# EAGLE board Qwiic_Button-Panel (EAGLE 9.4.0), part 1 of 2
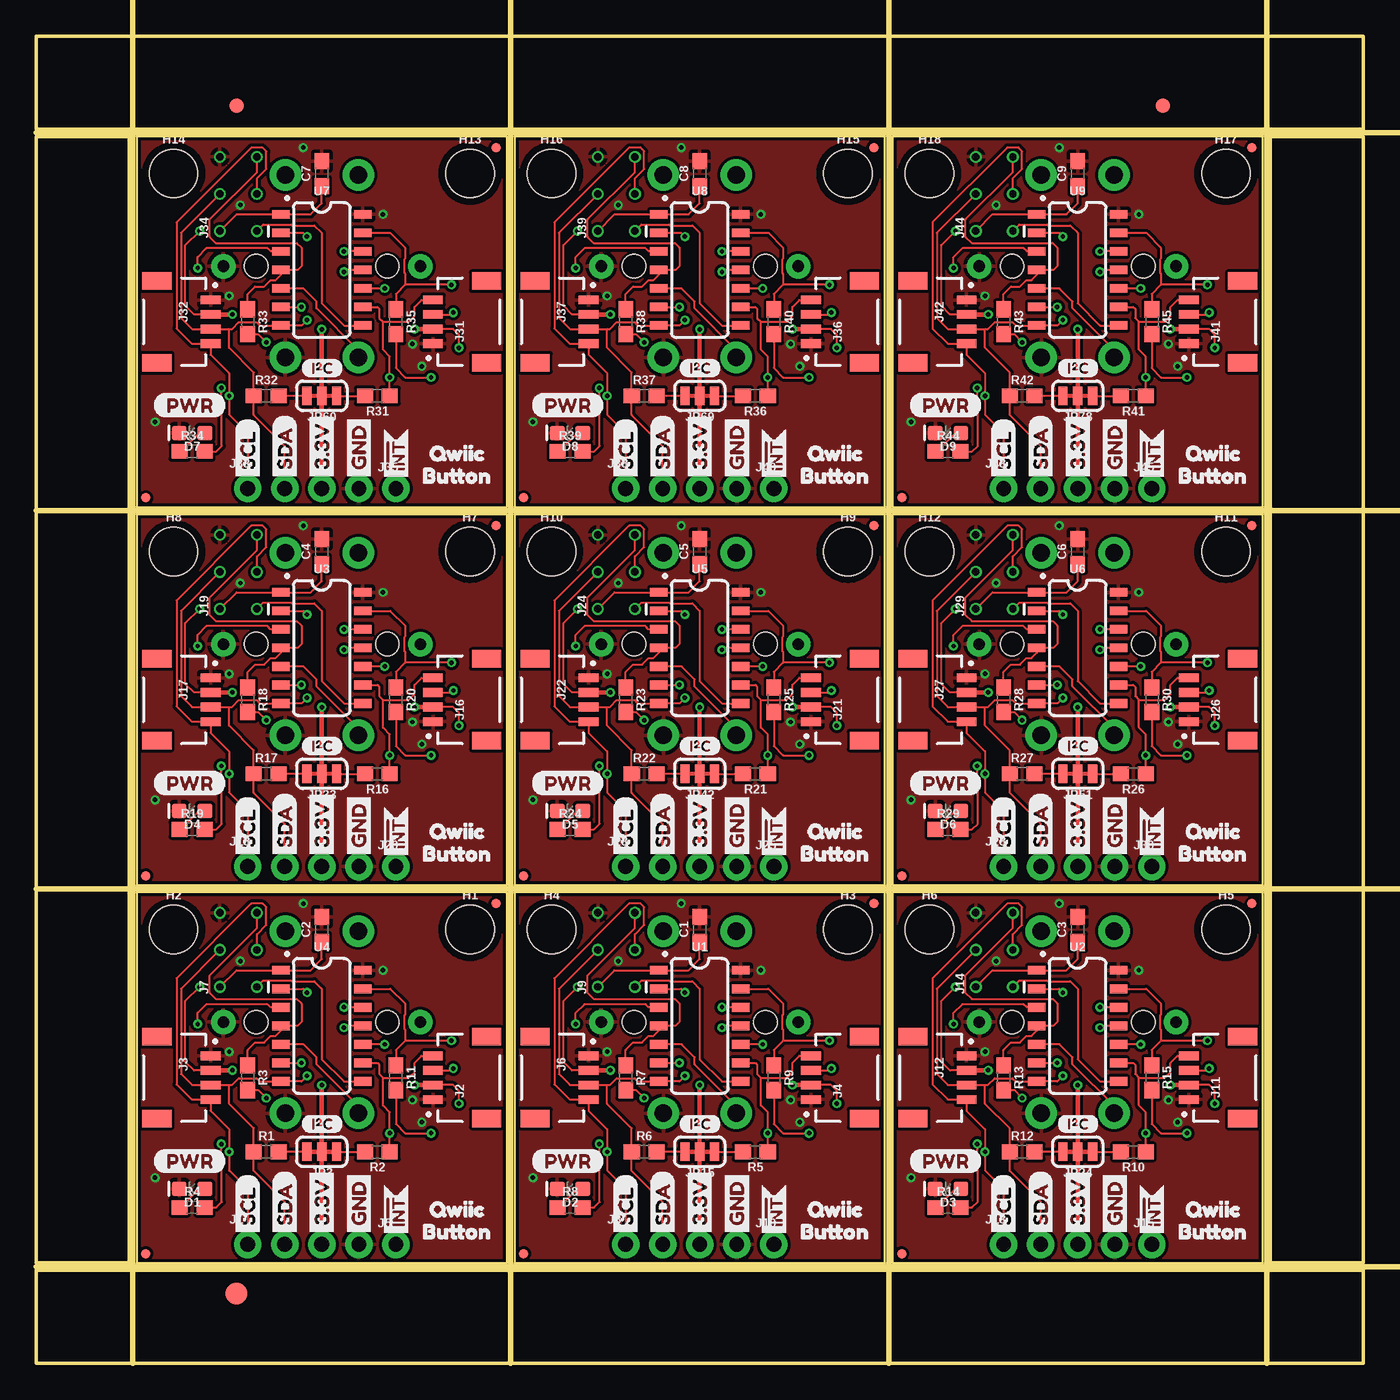
[diagram p0: board, top side]
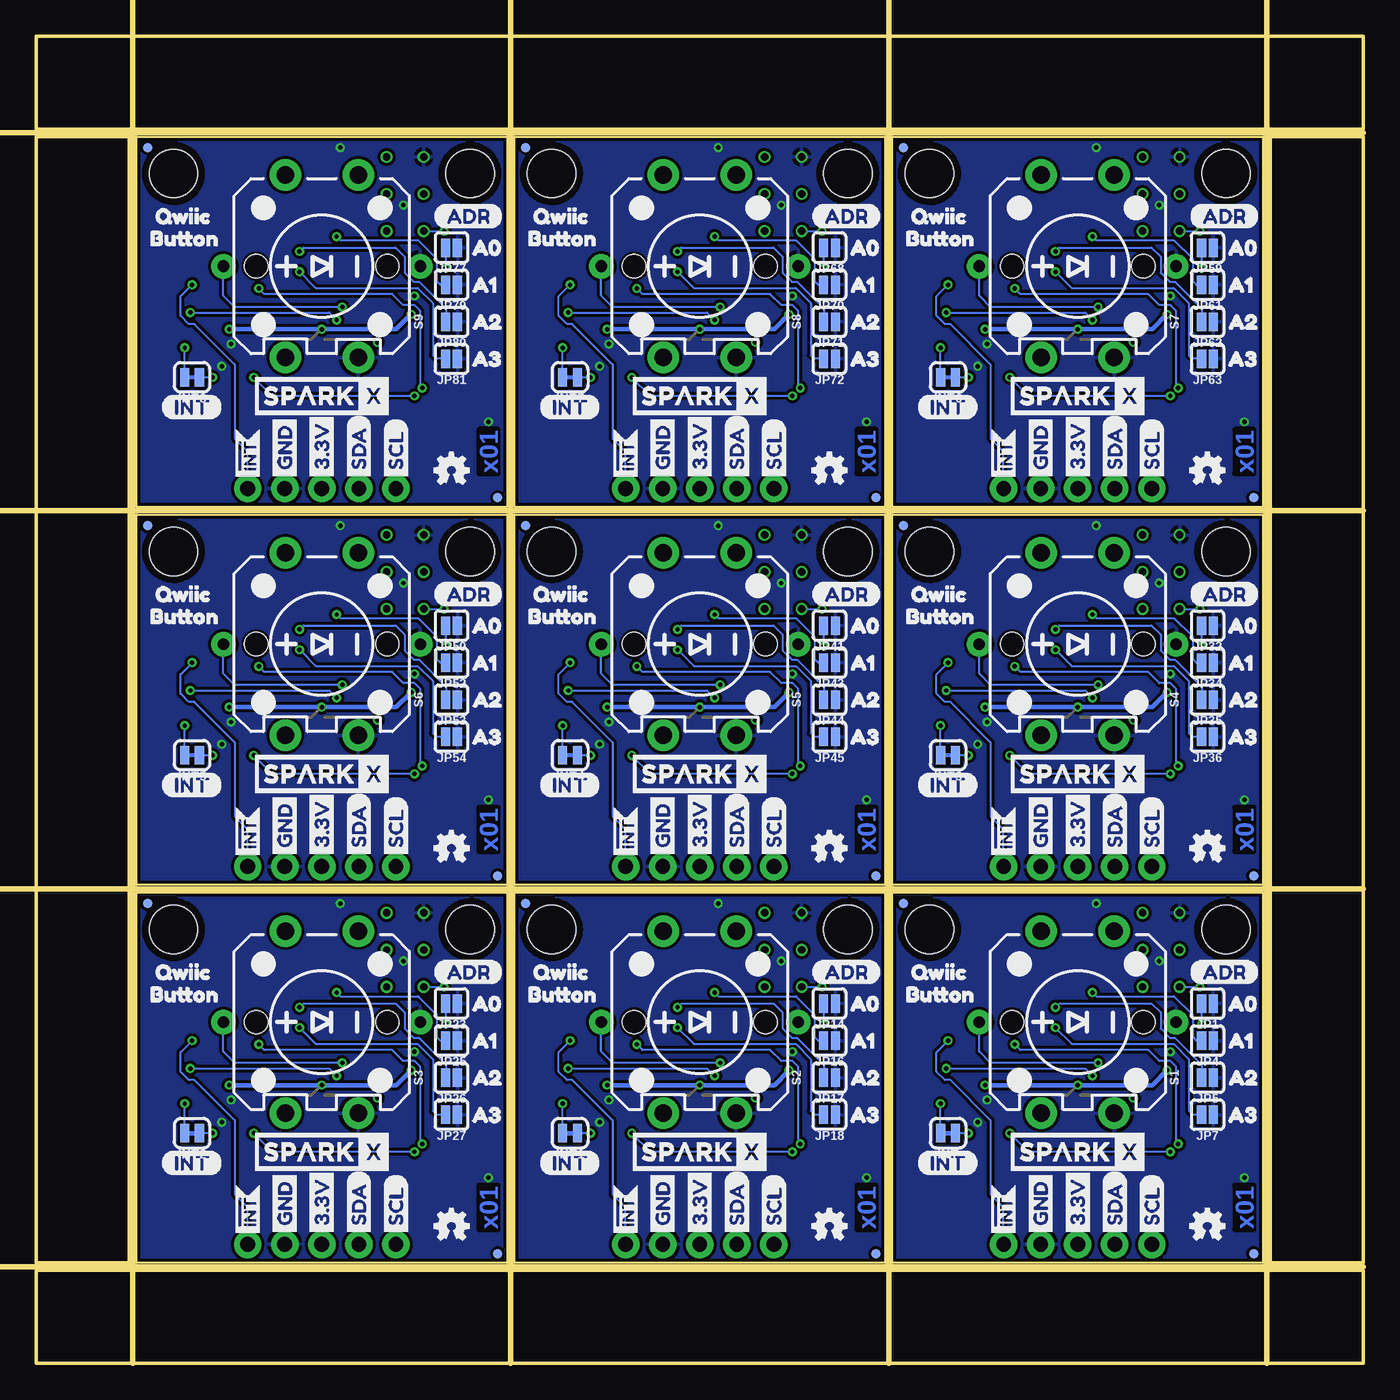
[diagram p1: board, bottom side, seen from below]

Size 90.93 x 90.93 mm. Coordinates in mm from the lower left corner, seen from the top.
Outline: 6.86,6.86 32.26,6.86 32.26,32.26 6.86,32.26 6.86,6.86
Outline: 32.77,6.86 58.17,6.86 58.17,32.26 32.77,32.26 32.77,6.86
Outline: 58.67,6.86 84.07,6.86 84.07,32.26 58.67,32.26 58.67,6.86
Outline: 6.86,32.77 32.26,32.77 32.26,58.17 6.86,58.17 6.86,32.77
Outline: 32.77,32.77 58.17,32.77 58.17,58.17 32.77,58.17 32.77,32.77
Outline: 58.67,32.77 84.07,32.77 84.07,58.17 58.67,58.17 58.67,32.77
Outline: 6.86,58.67 32.26,58.67 32.26,84.07 6.86,84.07 6.86,58.67
Outline: 32.77,58.67 58.17,58.67 58.17,84.07 32.77,84.07 32.77,58.67
Outline: 58.67,58.67 84.07,58.67 84.07,84.07 58.67,84.07 58.67,58.67
Outline: 0,6.35 90.93,6.35 90.93,0 0,0 0,6.35
Outline: 84.58,84.07 90.93,84.07 90.93,6.86 84.58,6.86 84.58,84.07
Outline: 0,90.93 90.93,90.93 90.93,84.58 0,84.58 0,90.93
Outline: 0,84.07 6.35,84.07 6.35,6.86 0,6.86 0,84.07
Copper layers (1*16): Top 0.035mm / dielectric 1.5mm / Bottom 0.035mm
Design rules "SparkFun-2-layer-PCBWay-LIMIT": minimum track width 6mil, minimum drill 0.3mm, track to track 6mil, track to pad 6mil, pad to pad 6mil, via to via 6mil, smd to smd 6mil, copper to edge 6mil, drill to drill 6mil, minimum pad ring 6mil, minimum via ring 6mil, stop-mask expansion 4mil, vias tented up to drill 25mil, thermal gap 10mil
Milling: 8 lines

## Footprints (pad centres in the part's own frame; a part is rotated, then mirrored left to right if it is on the bottom)
0603 = smd 1.1 x 1: 1 -0.85,0; 2 0.85,0
LED-0603 = smd 1 x 1: A -0.877,0; C 0.877,0
FIDUCIAL-1X2 = smd 1 x 1: 1 0,0
FIDUCIAL-1.5X3 = smd 1.5 x 1.5: 1 0,0
STAND-OFF = hole 3.302: 0,0
SMT-JUMPER_2_NC_TRACE_SILK = smd 0.635 x 1.27: 1 -0.508,0; 2 0.508,0
1X04_NO_SILK = drill 1.016 pad 1.88: 1 0,0; 2 2.54,0; 3 5.08,0; 4 7.62,0
JST04_1MM_RA = smd 0.6 x 1.35: 1 -1.5,0; 2 -0.5,0; 3 0.5,0; 4 1.5,0 | smd 1.2 x 2: NC1 2.8,-3.675; NC2 -2.8,-3.675
1X01_NO_SILK = drill 1.016 pad 1.88: 1 0,0
2X3_TEST_POINTS = drill 0.508: 1 -2.54,-1.27; 2 -2.54,1.27; 3 0,-1.27; 4 0,1.27; 5 2.54,-1.27; 6 2.54,1.27
SMT-JUMPER_2_NO_SILK = smd 0.635 x 1.27: 1 -0.406,0; 2 0.406,0
MICRO-FIDUCIAL = smd 0.635 x 0.635: 1 0,0
SMT-JUMPER_3_2-NC_TRACE_SILK = smd 0.635 x 1.27: 1 -1.016,0; 2 0,0; 3 1.016,0
TACTILE_SWITCH_LED_PTH_12MM = drill 1.2 pad 2.159: 1 -6.25,2.5; 2 6.25,2.5; 3 -6.25,-2.5; 4 6.25,-2.5 | drill 0.8 pad 1.676: A 0,-6.75; C 0,6.75 | hole 1.6: 0,4.5; 0,-4.5
SO14 = smd 0.6 x 1.2: 1 -3.175,-2.8; 2 -1.905,-2.8; 3 -0.635,-2.8; 4 0.635,-2.8; 5 1.905,-2.8; 6 3.175,-2.8; 7 4.445,-2.8; 8 4.445,2.8; 9 3.175,2.8; 10 1.905,2.8; 11 0.635,2.8; 12 -0.635,2.8; 13 -1.905,2.8; 14 -3.175,2.8

## Placement (x,y rotation side)
C1  0.1uF  [0603]  45.47,29.72 90 top
C2  0.1uF  [0603]  19.56,29.72 90 top
C3  0.1uF  [0603]  71.37,29.72 90 top
C4  0.1uF  [0603]  19.56,55.63 90 top
C5  0.1uF  [0603]  45.47,55.63 90 top
C6  0.1uF  [0603]  71.37,55.63 90 top
C7  0.1uF  [0603]  19.56,81.53 90 top
C8  0.1uF  [0603]  45.47,81.53 90 top
C9  0.1uF  [0603]  71.37,81.53 90 top
D1  RED  [LED-0603]  10.67,11.94 180 top
D2  RED  [LED-0603]  36.58,11.94 180 top
D3  RED  [LED-0603]  62.48,11.94 180 top
D4  RED  [LED-0603]  10.67,37.85 180 top
D5  RED  [LED-0603]  36.58,37.85 180 top
D6  RED  [LED-0603]  62.48,37.85 180 top
D7  RED  [LED-0603]  10.67,63.75 180 top
D8  RED  [LED-0603]  36.58,63.75 180 top
D9  RED  [LED-0603]  62.48,63.75 180 top
E$1  [FIDUCIAL-1X2]  13.72,86.17 0 top
E$2  [FIDUCIAL-1X2]  77.22,86.17 0 top
E$3  [FIDUCIAL-1.5X3]  13.72,4.76 0 top
H1  STAND-OFF  [STAND-OFF]  29.72,29.72 0 top
H2  STAND-OFF  [STAND-OFF]  9.4,29.72 0 top
H3  STAND-OFF  [STAND-OFF]  55.63,29.72 0 top
H4  STAND-OFF  [STAND-OFF]  35.31,29.72 0 top
H5  STAND-OFF  [STAND-OFF]  81.53,29.72 0 top
H6  STAND-OFF  [STAND-OFF]  61.21,29.72 0 top
H7  STAND-OFF  [STAND-OFF]  29.72,55.63 0 top
H8  STAND-OFF  [STAND-OFF]  9.4,55.63 0 top
H9  STAND-OFF  [STAND-OFF]  55.63,55.63 0 top
H10  STAND-OFF  [STAND-OFF]  35.31,55.63 0 top
H11  STAND-OFF  [STAND-OFF]  81.53,55.63 0 top
H12  STAND-OFF  [STAND-OFF]  61.21,55.63 0 top
H13  STAND-OFF  [STAND-OFF]  29.72,81.53 0 top
H14  STAND-OFF  [STAND-OFF]  9.4,81.53 0 top
H15  STAND-OFF  [STAND-OFF]  55.63,81.53 0 top
H16  STAND-OFF  [STAND-OFF]  35.31,81.53 0 top
H17  STAND-OFF  [STAND-OFF]  81.53,81.53 0 top
H18  STAND-OFF  [STAND-OFF]  61.21,81.53 0 top
INT  [SMT-JUMPER_2_NC_TRACE_SILK]  28.45,15.75 180 bottom
INT1  [SMT-JUMPER_2_NC_TRACE_SILK]  54.36,15.75 180 bottom
INT2  [SMT-JUMPER_2_NC_TRACE_SILK]  80.26,15.75 180 bottom
INT3  [SMT-JUMPER_2_NC_TRACE_SILK]  28.45,41.66 180 bottom
INT4  [SMT-JUMPER_2_NC_TRACE_SILK]  54.36,41.66 180 bottom
INT5  [SMT-JUMPER_2_NC_TRACE_SILK]  80.26,41.66 180 bottom
INT6  [SMT-JUMPER_2_NC_TRACE_SILK]  28.45,67.56 180 bottom
INT7  [SMT-JUMPER_2_NC_TRACE_SILK]  54.36,67.56 180 bottom
INT8  [SMT-JUMPER_2_NC_TRACE_SILK]  80.26,67.56 180 bottom
J1  [1X04_NO_SILK]  14.48,8.13 0 top
J2  [JST04_1MM_RA]  27.18,19.56 90 top
J3  [JST04_1MM_RA]  11.94,19.56 270 top
J4  [JST04_1MM_RA]  53.09,19.56 90 top
J5  [1X01_NO_SILK]  24.64,8.13 0 top
J6  [JST04_1MM_RA]  37.85,19.56 270 top
J7  ISP  [2X3_TEST_POINTS]  13.84,28.32 90 top
J8  [1X04_NO_SILK]  40.39,8.13 0 top
J9  ISP  [2X3_TEST_POINTS]  39.75,28.32 90 top
J10  [1X01_NO_SILK]  50.55,8.13 0 top
J11  [JST04_1MM_RA]  78.99,19.56 90 top
J12  [JST04_1MM_RA]  63.75,19.56 270 top
J13  [1X04_NO_SILK]  66.29,8.13 0 top
J14  ISP  [2X3_TEST_POINTS]  65.66,28.32 90 top
J15  [1X01_NO_SILK]  76.45,8.13 0 top
J16  [JST04_1MM_RA]  27.18,45.47 90 top
J17  [JST04_1MM_RA]  11.94,45.47 270 top
J18  [1X04_NO_SILK]  14.48,34.04 0 top
J19  ISP  [2X3_TEST_POINTS]  13.84,54.23 90 top
J20  [1X01_NO_SILK]  24.64,34.04 0 top
J21  [JST04_1MM_RA]  53.09,45.47 90 top
J22  [JST04_1MM_RA]  37.85,45.47 270 top
J23  [1X04_NO_SILK]  40.39,34.04 0 top
J24  ISP  [2X3_TEST_POINTS]  39.75,54.23 90 top
J25  [1X01_NO_SILK]  50.55,34.04 0 top
J26  [JST04_1MM_RA]  78.99,45.47 90 top
J27  [JST04_1MM_RA]  63.75,45.47 270 top
J28  [1X04_NO_SILK]  66.29,34.04 0 top
J29  ISP  [2X3_TEST_POINTS]  65.66,54.23 90 top
J30  [1X01_NO_SILK]  76.45,34.04 0 top
J31  [JST04_1MM_RA]  27.18,71.37 90 top
J32  [JST04_1MM_RA]  11.94,71.37 270 top
J33  [1X04_NO_SILK]  14.48,59.94 0 top
J34  ISP  [2X3_TEST_POINTS]  13.84,80.14 90 top
J35  [1X01_NO_SILK]  24.64,59.94 0 top
J36  [JST04_1MM_RA]  53.09,71.37 90 top
J37  [JST04_1MM_RA]  37.85,71.37 270 top
J38  [1X04_NO_SILK]  40.39,59.94 0 top
J39  ISP  [2X3_TEST_POINTS]  39.75,80.14 90 top
J40  [1X01_NO_SILK]  50.55,59.94 0 top
J41  [JST04_1MM_RA]  78.99,71.37 90 top
J42  [JST04_1MM_RA]  63.75,71.37 270 top
J43  [1X04_NO_SILK]  66.29,59.94 0 top
J44  ISP  [2X3_TEST_POINTS]  65.66,80.14 90 top
J45  [1X01_NO_SILK]  76.45,59.94 0 top
JP1  [SMT-JUMPER_2_NO_SILK]  10.67,24.64 180 bottom
JP2  FIDUCIALUFIDUCIAL  [MICRO-FIDUCIAL]  31.5,31.5 0 bottom
JP3  [SMT-JUMPER_3_2-NC_TRACE_SILK]  19.56,14.48 180 top
JP4  [SMT-JUMPER_2_NO_SILK]  10.67,22.1 180 bottom
JP5  [SMT-JUMPER_2_NO_SILK]  10.67,19.56 180 bottom
JP6  FIDUCIALUFIDUCIAL  [MICRO-FIDUCIAL]  7.49,7.49 0 bottom
JP7  [SMT-JUMPER_2_NO_SILK]  10.67,17.02 180 bottom
JP8  FIDUCIALUFIDUCIAL  [MICRO-FIDUCIAL]  7.49,7.49 0 top
JP9  FIDUCIALUFIDUCIAL  [MICRO-FIDUCIAL]  31.5,31.5 0 top
JP10  FIDUCIALUFIDUCIAL  [MICRO-FIDUCIAL]  57.4,31.5 0 bottom
JP11  FIDUCIALUFIDUCIAL  [MICRO-FIDUCIAL]  33.4,7.49 0 bottom
JP12  FIDUCIALUFIDUCIAL  [MICRO-FIDUCIAL]  33.4,7.49 0 top
JP13  FIDUCIALUFIDUCIAL  [MICRO-FIDUCIAL]  57.4,31.5 0 top
JP14  [SMT-JUMPER_2_NO_SILK]  36.58,24.64 180 bottom
JP15  [SMT-JUMPER_3_2-NC_TRACE_SILK]  45.47,14.48 180 top
JP16  [SMT-JUMPER_2_NO_SILK]  36.58,22.1 180 bottom
JP17  [SMT-JUMPER_2_NO_SILK]  36.58,19.56 180 bottom
JP18  [SMT-JUMPER_2_NO_SILK]  36.58,17.02 180 bottom
JP19  FIDUCIALUFIDUCIAL  [MICRO-FIDUCIAL]  83.31,31.5 0 bottom
JP20  FIDUCIALUFIDUCIAL  [MICRO-FIDUCIAL]  59.31,7.49 0 bottom
JP21  FIDUCIALUFIDUCIAL  [MICRO-FIDUCIAL]  59.31,7.49 0 top
JP22  FIDUCIALUFIDUCIAL  [MICRO-FIDUCIAL]  83.31,31.5 0 top
JP23  [SMT-JUMPER_2_NO_SILK]  62.48,24.64 180 bottom
JP24  [SMT-JUMPER_3_2-NC_TRACE_SILK]  71.37,14.48 180 top
JP25  [SMT-JUMPER_2_NO_SILK]  62.48,22.1 180 bottom
JP26  [SMT-JUMPER_2_NO_SILK]  62.48,19.56 180 bottom
JP27  [SMT-JUMPER_2_NO_SILK]  62.48,17.02 180 bottom
JP28  FIDUCIALUFIDUCIAL  [MICRO-FIDUCIAL]  31.5,57.4 0 bottom
JP29  FIDUCIALUFIDUCIAL  [MICRO-FIDUCIAL]  7.49,33.4 0 bottom
JP30  FIDUCIALUFIDUCIAL  [MICRO-FIDUCIAL]  7.49,33.4 0 top
JP31  FIDUCIALUFIDUCIAL  [MICRO-FIDUCIAL]  31.5,57.4 0 top
JP32  [SMT-JUMPER_2_NO_SILK]  10.67,50.55 180 bottom
JP33  [SMT-JUMPER_3_2-NC_TRACE_SILK]  19.56,40.39 180 top
JP34  [SMT-JUMPER_2_NO_SILK]  10.67,48.01 180 bottom
JP35  [SMT-JUMPER_2_NO_SILK]  10.67,45.47 180 bottom
JP36  [SMT-JUMPER_2_NO_SILK]  10.67,42.93 180 bottom
JP37  FIDUCIALUFIDUCIAL  [MICRO-FIDUCIAL]  57.4,57.4 0 bottom
JP38  FIDUCIALUFIDUCIAL  [MICRO-FIDUCIAL]  33.4,33.4 0 bottom
JP39  FIDUCIALUFIDUCIAL  [MICRO-FIDUCIAL]  33.4,33.4 0 top
JP40  FIDUCIALUFIDUCIAL  [MICRO-FIDUCIAL]  57.4,57.4 0 top
JP41  [SMT-JUMPER_2_NO_SILK]  36.58,50.55 180 bottom
JP42  [SMT-JUMPER_3_2-NC_TRACE_SILK]  45.47,40.39 180 top
JP43  [SMT-JUMPER_2_NO_SILK]  36.58,48.01 180 bottom
JP44  [SMT-JUMPER_2_NO_SILK]  36.58,45.47 180 bottom
JP45  [SMT-JUMPER_2_NO_SILK]  36.58,42.93 180 bottom
JP46  FIDUCIALUFIDUCIAL  [MICRO-FIDUCIAL]  83.31,57.4 0 bottom
JP47  FIDUCIALUFIDUCIAL  [MICRO-FIDUCIAL]  59.31,33.4 0 bottom
JP48  FIDUCIALUFIDUCIAL  [MICRO-FIDUCIAL]  59.31,33.4 0 top
JP49  FIDUCIALUFIDUCIAL  [MICRO-FIDUCIAL]  83.31,57.4 0 top
JP50  [SMT-JUMPER_2_NO_SILK]  62.48,50.55 180 bottom
JP51  [SMT-JUMPER_3_2-NC_TRACE_SILK]  71.37,40.39 180 top
JP52  [SMT-JUMPER_2_NO_SILK]  62.48,48.01 180 bottom
JP53  [SMT-JUMPER_2_NO_SILK]  62.48,45.47 180 bottom
JP54  [SMT-JUMPER_2_NO_SILK]  62.48,42.93 180 bottom
JP55  FIDUCIALUFIDUCIAL  [MICRO-FIDUCIAL]  31.5,83.31 0 bottom
JP56  FIDUCIALUFIDUCIAL  [MICRO-FIDUCIAL]  7.49,59.31 0 bottom
JP57  FIDUCIALUFIDUCIAL  [MICRO-FIDUCIAL]  7.49,59.31 0 top
JP58  FIDUCIALUFIDUCIAL  [MICRO-FIDUCIAL]  31.5,83.31 0 top
JP59  [SMT-JUMPER_2_NO_SILK]  10.67,76.45 180 bottom
JP60  [SMT-JUMPER_3_2-NC_TRACE_SILK]  19.56,66.29 180 top
JP61  [SMT-JUMPER_2_NO_SILK]  10.67,73.91 180 bottom
JP62  [SMT-JUMPER_2_NO_SILK]  10.67,71.37 180 bottom
JP63  [SMT-JUMPER_2_NO_SILK]  10.67,68.83 180 bottom
JP64  FIDUCIALUFIDUCIAL  [MICRO-FIDUCIAL]  57.4,83.31 0 bottom
JP65  FIDUCIALUFIDUCIAL  [MICRO-FIDUCIAL]  33.4,59.31 0 bottom
JP66  FIDUCIALUFIDUCIAL  [MICRO-FIDUCIAL]  33.4,59.31 0 top
JP67  FIDUCIALUFIDUCIAL  [MICRO-FIDUCIAL]  57.4,83.31 0 top
JP68  [SMT-JUMPER_2_NO_SILK]  36.58,76.45 180 bottom
JP69  [SMT-JUMPER_3_2-NC_TRACE_SILK]  45.47,66.29 180 top
JP70  [SMT-JUMPER_2_NO_SILK]  36.58,73.91 180 bottom
JP71  [SMT-JUMPER_2_NO_SILK]  36.58,71.37 180 bottom
JP72  [SMT-JUMPER_2_NO_SILK]  36.58,68.83 180 bottom
JP73  FIDUCIALUFIDUCIAL  [MICRO-FIDUCIAL]  83.31,83.31 0 bottom
JP74  FIDUCIALUFIDUCIAL  [MICRO-FIDUCIAL]  59.31,59.31 0 bottom
JP75  FIDUCIALUFIDUCIAL  [MICRO-FIDUCIAL]  59.31,59.31 0 top
JP76  FIDUCIALUFIDUCIAL  [MICRO-FIDUCIAL]  83.31,83.31 0 top
JP77  [SMT-JUMPER_2_NO_SILK]  62.48,76.45 180 bottom
JP78  [SMT-JUMPER_3_2-NC_TRACE_SILK]  71.37,66.29 180 top
JP79  [SMT-JUMPER_2_NO_SILK]  62.48,73.91 180 bottom
JP80  [SMT-JUMPER_2_NO_SILK]  62.48,71.37 180 bottom
JP81  [SMT-JUMPER_2_NO_SILK]  62.48,68.83 180 bottom
LOGO1  OSHW-LOGOMINI  [OSHW-LOGO-MINI]  10.67,9.4 0 bottom
LOGO2  OSHW-LOGOMINI  [OSHW-LOGO-MINI]  36.58,9.4 0 bottom
LOGO3  OSHW-LOGOMINI  [OSHW-LOGO-MINI]  62.48,9.4 0 bottom
LOGO4  OSHW-LOGOMINI  [OSHW-LOGO-MINI]  10.67,35.31 0 bottom
LOGO5  OSHW-LOGOMINI  [OSHW-LOGO-MINI]  36.58,35.31 0 bottom
LOGO6  OSHW-LOGOMINI  [OSHW-LOGO-MINI]  62.48,35.31 0 bottom
LOGO7  OSHW-LOGOMINI  [OSHW-LOGO-MINI]  10.67,61.21 0 bottom
LOGO8  OSHW-LOGOMINI  [OSHW-LOGO-MINI]  36.58,61.21 0 bottom
LOGO9  OSHW-LOGOMINI  [OSHW-LOGO-MINI]  62.48,61.21 0 bottom
R1  2.2k  [0603]  15.75,14.48 0 top
R2  2.2k  [0603]  23.37,14.48 180 top
R3  10k  [0603]  14.48,19.56 270 top
R4  1k  [0603]  10.67,10.67 0 top
R5  2.2k  [0603]  49.28,14.48 180 top
R6  2.2k  [0603]  41.66,14.48 0 top
R7  10k  [0603]  40.39,19.56 270 top
R8  1k  [0603]  36.58,10.67 0 top
R9  10k  [0603]  50.55,19.56 270 top
R10  2.2k  [0603]  75.18,14.48 180 top
R11  10k  [0603]  24.64,19.56 270 top
R12  2.2k  [0603]  67.56,14.48 0 top
R13  10k  [0603]  66.29,19.56 270 top
R14  1k  [0603]  62.48,10.67 0 top
R15  10k  [0603]  76.45,19.56 270 top
R16  2.2k  [0603]  23.37,40.39 180 top
R17  2.2k  [0603]  15.75,40.39 0 top
R18  10k  [0603]  14.48,45.47 270 top
R19  1k  [0603]  10.67,36.58 0 top
R20  10k  [0603]  24.64,45.47 270 top
R21  2.2k  [0603]  49.28,40.39 180 top
R22  2.2k  [0603]  41.66,40.39 0 top
R23  10k  [0603]  40.39,45.47 270 top
R24  1k  [0603]  36.58,36.58 0 top
R25  10k  [0603]  50.55,45.47 270 top
R26  2.2k  [0603]  75.18,40.39 180 top
R27  2.2k  [0603]  67.56,40.39 0 top
R28  10k  [0603]  66.29,45.47 270 top
R29  1k  [0603]  62.48,36.58 0 top
R30  10k  [0603]  76.45,45.47 270 top
R31  2.2k  [0603]  23.37,66.29 180 top
R32  2.2k  [0603]  15.75,66.29 0 top
R33  10k  [0603]  14.48,71.37 270 top
R34  1k  [0603]  10.67,62.48 0 top
R35  10k  [0603]  24.64,71.37 270 top
R36  2.2k  [0603]  49.28,66.29 180 top
R37  2.2k  [0603]  41.66,66.29 0 top
R38  10k  [0603]  40.39,71.37 270 top
R39  1k  [0603]  36.58,62.48 0 top
R40  10k  [0603]  50.55,71.37 270 top
R41  2.2k  [0603]  75.18,66.29 180 top
R42  2.2k  [0603]  67.56,66.29 0 top
R43  10k  [0603]  66.29,71.37 270 top
R44  1k  [0603]  62.48,62.48 0 top
R45  10k  [0603]  76.45,71.37 270 top
S1  Button  [TACTILE_SWITCH_LED_PTH_12MM]  19.56,23.37 270 bottom
S2  Button  [TACTILE_SWITCH_LED_PTH_12MM]  45.47,23.37 270 bottom
S3  Button  [TACTILE_SWITCH_LED_PTH_12MM]  71.37,23.37 270 bottom
S4  Button  [TACTILE_SWITCH_LED_PTH_12MM]  19.56,49.28 270 bottom
S5  Button  [TACTILE_SWITCH_LED_PTH_12MM]  45.47,49.28 270 bottom
S6  Button  [TACTILE_SWITCH_LED_PTH_12MM]  71.37,49.28 270 bottom
S7  Button  [TACTILE_SWITCH_LED_PTH_12MM]  19.56,75.18 270 bottom
S8  Button  [TACTILE_SWITCH_LED_PTH_12MM]  45.47,75.18 270 bottom
S9  Button  [TACTILE_SWITCH_LED_PTH_12MM]  71.37,75.18 270 bottom
U1  ATTINY84-ARDUINO  [SO14]  45.47,23.75 270 top
U2  ATTINY84-ARDUINO  [SO14]  71.37,23.75 270 top
U3  ATTINY84-ARDUINO  [SO14]  19.56,49.66 270 top
U4  ATTINY84-ARDUINO  [SO14]  19.56,23.75 270 top
U5  ATTINY84-ARDUINO  [SO14]  45.47,49.66 270 top
U6  ATTINY84-ARDUINO  [SO14]  71.37,49.66 270 top
U7  ATTINY84-ARDUINO  [SO14]  19.56,75.56 270 top
U8  ATTINY84-ARDUINO  [SO14]  45.47,75.56 270 top
U9  ATTINY84-ARDUINO  [SO14]  71.37,75.56 270 top
U$1  [BUTTON1]  25.53,9.02 0 top
U$2  [BUTTON1]  32.26,25.27 0 bottom
U$3  [PWR-()-04]  8,13.84 0 top
U$4  [INT-()-04]  30.61,13.72 0 bottom
U$5  [SCL]  14.48,8.51 90 bottom
U$6  [SDA]  17.02,8.51 90 bottom
U$7  [3.3V]  19.56,8.51 90 bottom
U$8  [GND]  22.1,8.51 90 bottom
U$9  [(ADR)]  11.94,26.8 0 bottom
U$10  [I_SUPER2_C-()-03]  18.16,16.38 0 top
U$11  [INT#-[<-04]  24.64,8.25 90 top
U$12  [SDA]  17.02,8.51 90 top
U$13  [GND]  22.1,8.51 90 top
U$14  [SCL]  14.48,8.51 90 top
U$15  [INT#-[<-04]  24.64,8.25 90 bottom
U$16  [A00]  10.16,24.64 0 bottom
U$17  [A11]  10.29,22.1 0 bottom
U$18  [SPARKX-MEDIUM]  19.56,14.48 0 bottom
U$19  [A22]  10.29,19.56 0 bottom
U$20  [QWIIC0]  31.88,26.8 0 bottom
U$21  [A33]  10.16,17.02 0 bottom
U$22  [3.3V]  19.56,8.51 90 top
U$23  [QWIIC0]  26.04,10.54 0 top
U$24  [SCL]  40.39,8.51 90 bottom
U$25  [SDA]  42.93,8.51 90 bottom
U$26  [3.3V]  45.47,8.51 90 bottom
U$27  [GND]  48.01,8.51 90 bottom
U$28  [(ADR)]  37.85,26.8 0 bottom
U$29  [GND]  48.01,8.51 90 top
U$30  [3.3V]  45.47,8.51 90 top
U$31  [I_SUPER2_C-()-03]  44.07,16.38 0 top
U$32  [INT#-[<-04]  50.55,8.25 90 top
U$33  [SDA]  42.93,8.51 90 top
U$34  [SCL]  40.39,8.51 90 top
U$35  [INT#-[<-04]  50.55,8.25 90 bottom
U$36  [SPARKX-MEDIUM]  45.47,14.48 0 bottom
U$37  [INT-()-04]  56.51,13.72 0 bottom
U$38  [BUTTON1]  51.43,9.02 0 top
U$39  [BUTTON1]  58.17,25.27 0 bottom
U$40  [QWIIC0]  57.78,26.8 0 bottom
U$41  [QWIIC0]  51.94,10.54 0 top
U$42  [PWR-()-04]  33.91,13.84 0 top
U$43  [A00]  36.07,24.64 0 bottom
U$44  [A11]  36.2,22.1 0 bottom
U$45  [A22]  36.2,19.56 0 bottom
U$46  [A33]  36.07,17.02 0 bottom
U$47  [SCL]  66.29,8.51 90 bottom
U$48  [SDA]  68.83,8.51 90 bottom
U$49  [3.3V]  71.37,8.51 90 bottom
U$50  [GND]  73.91,8.51 90 bottom
U$51  [(ADR)]  63.75,26.8 0 bottom
U$52  [GND]  73.91,8.51 90 top
U$53  [3.3V]  71.37,8.51 90 top
U$54  [I_SUPER2_C-()-03]  69.98,16.38 0 top
U$55  [INT#-[<-04]  76.45,8.25 90 top
U$56  [SDA]  68.83,8.51 90 top
U$57  [SCL]  66.29,8.51 90 top
U$58  [INT#-[<-04]  76.45,8.25 90 bottom
U$59  [SPARKX-MEDIUM]  71.37,14.48 0 bottom
U$60  [INT-()-04]  82.42,13.72 0 bottom
U$61  [BUTTON1]  77.34,9.02 0 top
U$62  [BUTTON1]  84.07,25.27 0 bottom
U$63  [QWIIC0]  83.69,26.8 0 bottom
U$64  [QWIIC0]  77.85,10.54 0 top
U$65  [PWR-()-04]  59.82,13.84 0 top
U$66  [A00]  61.98,24.64 0 bottom
U$67  [A11]  62.1,22.1 0 bottom
U$68  [A22]  62.1,19.56 0 bottom
U$69  [A33]  61.98,17.02 0 bottom
U$70  [SCL]  14.48,34.42 90 bottom
U$71  [SDA]  17.02,34.42 90 bottom
U$72  [3.3V]  19.56,34.42 90 bottom
U$73  [GND]  22.1,34.42 90 bottom
U$74  [(ADR)]  11.94,52.7 0 bottom
U$75  [GND]  22.1,34.42 90 top
U$76  [3.3V]  19.56,34.42 90 top
U$77  [I_SUPER2_C-()-03]  18.16,42.29 0 top
U$78  [INT#-[<-04]  24.64,34.16 90 top
U$79  [SDA]  17.02,34.42 90 top
U$80  [SCL]  14.48,34.42 90 top
U$81  [INT#-[<-04]  24.64,34.16 90 bottom
U$82  [SPARKX-MEDIUM]  19.56,40.39 0 bottom
U$83  [INT-()-04]  30.61,39.62 0 bottom
U$84  [BUTTON1]  25.53,34.92 0 top
U$85  [BUTTON1]  32.26,51.18 0 bottom
U$86  [QWIIC0]  31.88,52.7 0 bottom
U$87  [QWIIC0]  26.04,36.45 0 top
U$88  [PWR-()-04]  8,39.75 0 top
U$89  [A00]  10.16,50.55 0 bottom
U$90  [A11]  10.29,48.01 0 bottom
U$91  [A22]  10.29,45.47 0 bottom
U$92  [A33]  10.16,42.93 0 bottom
U$93  [SCL]  40.39,34.42 90 bottom
U$94  [SDA]  42.93,34.42 90 bottom
U$95  [3.3V]  45.47,34.42 90 bottom
U$96  [GND]  48.01,34.42 90 bottom
U$97  [(ADR)]  37.85,52.7 0 bottom
U$98  [GND]  48.01,34.42 90 top
U$99  [3.3V]  45.47,34.42 90 top
U$100  [I_SUPER2_C-()-03]  44.07,42.29 0 top
U$101  [INT#-[<-04]  50.55,34.16 90 top
U$102  [SDA]  42.93,34.42 90 top
U$103  [SCL]  40.39,34.42 90 top
U$104  [INT#-[<-04]  50.55,34.16 90 bottom
U$105  [SPARKX-MEDIUM]  45.47,40.39 0 bottom
U$106  [INT-()-04]  56.51,39.62 0 bottom
U$107  [BUTTON1]  51.43,34.92 0 top
U$108  [BUTTON1]  58.17,51.18 0 bottom
U$109  [QWIIC0]  57.78,52.7 0 bottom
U$110  [QWIIC0]  51.94,36.45 0 top
U$111  [PWR-()-04]  33.91,39.75 0 top
U$112  [A00]  36.07,50.55 0 bottom
U$113  [A11]  36.2,48.01 0 bottom
U$114  [A22]  36.2,45.47 0 bottom
U$115  [A33]  36.07,42.93 0 bottom
U$116  [SCL]  66.29,34.42 90 bottom
U$117  [SDA]  68.83,34.42 90 bottom
U$118  [3.3V]  71.37,34.42 90 bottom
U$119  [GND]  73.91,34.42 90 bottom
U$120  [(ADR)]  63.75,52.7 0 bottom
U$121  [GND]  73.91,34.42 90 top
U$122  [3.3V]  71.37,34.42 90 top
U$123  [I_SUPER2_C-()-03]  69.98,42.29 0 top
U$124  [INT#-[<-04]  76.45,34.16 90 top
U$125  [SDA]  68.83,34.42 90 top
U$126  [SCL]  66.29,34.42 90 top
U$127  [INT#-[<-04]  76.45,34.16 90 bottom
U$128  [SPARKX-MEDIUM]  71.37,40.39 0 bottom
U$129  [INT-()-04]  82.42,39.62 0 bottom
U$130  [BUTTON1]  77.34,34.92 0 top
U$131  [BUTTON1]  84.07,51.18 0 bottom
U$132  [QWIIC0]  83.69,52.7 0 bottom
U$133  [QWIIC0]  77.85,36.45 0 top
U$134  [PWR-()-04]  59.82,39.75 0 top
U$135  [A00]  61.98,50.55 0 bottom
U$136  [A11]  62.1,48.01 0 bottom
U$137  [A22]  62.1,45.47 0 bottom
U$138  [A33]  61.98,42.93 0 bottom
U$139  [SCL]  14.48,60.32 90 bottom
U$140  [SDA]  17.02,60.32 90 bottom
U$141  [3.3V]  19.56,60.32 90 bottom
U$142  [GND]  22.1,60.32 90 bottom
U$143  [(ADR)]  11.94,78.61 0 bottom
U$144  [GND]  22.1,60.32 90 top
U$145  [3.3V]  19.56,60.32 90 top
U$146  [I_SUPER2_C-()-03]  18.16,68.2 0 top
U$147  [INT#-[<-04]  24.64,60.07 90 top
U$148  [SDA]  17.02,60.32 90 top
U$149  [SCL]  14.48,60.32 90 top
U$150  [INT#-[<-04]  24.64,60.07 90 bottom
U$151  [SPARKX-MEDIUM]  19.56,66.29 0 bottom
U$152  [INT-()-04]  30.61,65.53 0 bottom
U$153  [BUTTON1]  25.53,60.83 0 top
U$154  [BUTTON1]  32.26,77.09 0 bottom
U$155  [QWIIC0]  31.88,78.61 0 bottom
U$156  [QWIIC0]  26.04,62.36 0 top
U$157  [PWR-()-04]  8,65.66 0 top
U$158  [A00]  10.16,76.45 0 bottom
U$159  [A11]  10.29,73.91 0 bottom
U$160  [A22]  10.29,71.37 0 bottom
U$161  [A33]  10.16,68.83 0 bottom
U$162  [SCL]  40.39,60.32 90 bottom
U$163  [SDA]  42.93,60.32 90 bottom
U$164  [3.3V]  45.47,60.32 90 bottom
U$165  [GND]  48.01,60.32 90 bottom
U$166  [(ADR)]  37.85,78.61 0 bottom
U$167  [GND]  48.01,60.32 90 top
U$168  [3.3V]  45.47,60.32 90 top
U$169  [I_SUPER2_C-()-03]  44.07,68.2 0 top
U$170  [INT#-[<-04]  50.55,60.07 90 top
U$171  [SDA]  42.93,60.32 90 top
U$172  [SCL]  40.39,60.32 90 top
U$173  [INT#-[<-04]  50.55,60.07 90 bottom
U$174  [SPARKX-MEDIUM]  45.47,66.29 0 bottom
U$175  [INT-()-04]  56.51,65.53 0 bottom
U$176  [BUTTON1]  51.43,60.83 0 top
U$177  [BUTTON1]  58.17,77.09 0 bottom
U$178  [QWIIC0]  57.78,78.61 0 bottom
U$179  [QWIIC0]  51.94,62.36 0 top
U$180  [PWR-()-04]  33.91,65.66 0 top
U$181  [A00]  36.07,76.45 0 bottom
U$182  [A11]  36.2,73.91 0 bottom
U$183  [A22]  36.2,71.37 0 bottom
U$184  [A33]  36.07,68.83 0 bottom
U$185  [SCL]  66.29,60.32 90 bottom
U$186  [SDA]  68.83,60.32 90 bottom
U$187  [3.3V]  71.37,60.32 90 bottom
U$188  [GND]  73.91,60.32 90 bottom
U$189  [(ADR)]  63.75,78.61 0 bottom
U$190  [GND]  73.91,60.32 90 top
U$191  [3.3V]  71.37,60.32 90 top
U$192  [I_SUPER2_C-()-03]  69.98,68.2 0 top
U$193  [INT#-[<-04]  76.45,60.07 90 top
U$194  [SDA]  68.83,60.32 90 top
U$195  [SCL]  66.29,60.32 90 top
U$196  [INT#-[<-04]  76.45,60.07 90 bottom
U$197  [SPARKX-MEDIUM]  71.37,66.29 0 bottom
U$198  [INT-()-04]  82.42,65.53 0 bottom
U$199  [BUTTON1]  77.34,60.83 0 top
U$200  [BUTTON1]  84.07,77.09 0 bottom
U$201  [QWIIC0]  83.69,78.61 0 bottom
U$202  [QWIIC0]  77.85,62.36 0 top
U$203  [PWR-()-04]  59.82,65.66 0 top
U$204  [A00]  61.98,76.45 0 bottom
U$205  [A11]  62.1,73.91 0 bottom
U$206  [A22]  62.1,71.37 0 bottom
U$207  [A33]  61.98,68.83 0 bottom

## Library data of the parts
C1-C9 = SparkFun-Capacitors; PROD_ID: CAP-00810
D1-D9 = SparkFun-LED; PROD_ID: DIO-00819
E$1 E$2 LOGO1-LOGO9 = SparkFun-Aesthetics
E$3 = SparkFun-Retired
H1-H18 = SparkFun-Hardware
INT INT1-INT8 JP1 JP3-JP5 JP7 JP14-JP18 JP23-JP27 JP32-JP36 JP41-JP45 JP50-JP54 JP59-JP63 JP68-JP72 JP77-JP81 = SparkFun-Jumpers
J1 J8 J13 J18 J23 J28 J33 J38 J43 = SparkFun-Connectors; PROD_ID: CONN-09696
J2-J4 J6 J11 J12 J16 J17 J21 J22 J26 J27 J31 J32 J36 J37 J41 J42 = SparkFun-Connectors; PROD_ID: CONN-13694
J5 J7 J9 J10 J14 J15 J19 J20 J24 J25 J29 J30 J34 J35 J39 J40 J44 J45 = SparkFun-Connectors
JP2 JP6 JP8-JP13 JP19-JP22 JP28-JP31 JP37-JP40 JP46-JP49 JP55-JP58 JP64-JP67 JP73-JP76 = SparkFun
R1 R2 R5 R6 R10 R12 R16 R17 R21 R22 R26 R27 R31 R32 R36 R37 R41 R42 = SparkFun-Resistors; PROD_ID: RES-08272
R3 R7 R9 R11 R13 R15 R18 R20 R23 R25 R28 R30 R33 R35 R38 R40 R43 R45 = SparkFun-Resistors; PROD_ID: RES-00824
R4 R8 R14 R19 R24 R29 R34 R39 R44 = SparkFun-Resistors; PROD_ID: RES-07856
S1-S9 = SparkFun-Switches; PROD_ID: SWCH-11758; SF_SKU: COM-10442
U1-U9 = SparkFun-IC-Microcontroller; PROD_ID: IC-14155
U$1 U$2 U$20 U$23 U$38-U$41 U$61-U$64 U$84-U$87 U$107-U$110 U$130-U$133 U$153-U$156 U$176-U$179 U$199-U$202 = buzzard_labels (4)
U$3 U$4 U$10 U$11 U$15 U$31 U$32 U$35 U$37 U$42 U$54 U$55 U$58 U$60 U$65 U$77 U$78 U$81 U$83 U$88 U$100 U$101 U$104 U$106 U$111 U$123 U$124 U$127 U$129 U$134 U$146 U$147 U$150 U$152 U$157 U$169 U$170 U$173 U$175 U$180 U$192 U$193 U$196 U$198 U$203 = Labels
U$5-U$9 U$12-U$14 U$22 U$24-U$30 U$33 U$34 U$47-U$53 U$56 U$57 U$70-U$76 U$79 U$80 U$93-U$99 U$102 U$103 U$116-U$122 U$125 U$126 U$139-U$145 U$148 U$149 U$162-U$168 U$171 U$172 U$185-U$191 U$194 U$195 = Labels-0_04
U$16 U$17 U$19 U$21 U$43-U$46 U$66-U$69 U$89-U$92 U$112-U$115 U$135-U$138 U$158-U$161 U$181-U$184 U$204-U$207 = buzzard_labels (8)
U$18 U$36 U$59 U$82 U$105 U$128 U$151 U$174 U$197 = SparkX

## Nets
3.3V: C2.1 INT.2 J1.3 J2.2 J3.2 J7.2 JP3.2 R3.2 U4.1
3.3V1: C1.1 INT1.2 J4.2 J6.2 J8.3 J9.2 JP15.2 R7.2 U1.1
3.3V2: C3.1 INT2.2 J11.2 J12.2 J13.3 J14.2 JP24.2 R13.2 U2.1
3.3V3: C4.1 INT3.2 J16.2 J17.2 J18.3 J19.2 JP33.2 R18.2 U3.1
3.3V4: C5.1 INT4.2 J21.2 J22.2 J23.3 J24.2 JP42.2 R23.2 U5.1
3.3V5: C6.1 INT5.2 J26.2 J27.2 J28.3 J29.2 JP51.2 R28.2 U6.1
3.3V6: C7.1 INT6.2 J31.2 J32.2 J33.3 J34.2 JP60.2 R33.2 U7.1
3.3V7: C8.1 INT7.2 J36.2 J37.2 J38.3 J39.2 JP69.2 R38.2 U8.1
3.3V8: C9.1 INT8.2 J41.2 J42.2 J43.3 J44.2 JP78.2 R43.2 U9.1
!INT: J5.1 R11.1 U4.13
!INT1: J10.1 R9.1 U1.13
!INT2: J15.1 R15.1 U2.13
!INT3: J20.1 R20.1 U3.13
!INT4: J25.1 R25.1 U5.13
!INT5: J30.1 R30.1 U6.13
!INT6: J35.1 R35.1 U7.13
!INT7: J40.1 R40.1 U8.13
!INT8: J45.1 R45.1 U9.13
!RST: J7.5 R3.1 U4.4
!RST1: J9.5 R7.1 U1.4
!RST2: J14.5 R13.1 U2.4
!RST3: J19.5 R18.1 U3.4
!RST4: J24.5 R23.1 U5.4
!RST5: J29.5 R28.1 U6.4
!RST6: J34.5 R33.1 U7.4
!RST7: J39.5 R38.1 U8.4
!RST8: J44.5 R43.1 U9.4
ADR0: JP1.2 U4.3
ADR1: JP4.2 U4.2
ADR2: JP5.2 U4.12
ADR3: JP7.2 U4.11
ADR4: JP14.2 U1.3
ADR5: JP16.2 U1.2
ADR6: JP17.2 U1.12
ADR7: JP18.2 U1.11
ADR8: JP23.2 U2.3
ADR9: JP25.2 U2.2
ADR10: JP26.2 U2.12
ADR11: JP27.2 U2.11
ADR12: JP32.2 U3.3
ADR13: JP34.2 U3.2
ADR14: JP35.2 U3.12
ADR15: JP36.2 U3.11
ADR16: JP41.2 U5.3
ADR17: JP43.2 U5.2
ADR18: JP44.2 U5.12
ADR19: JP45.2 U5.11
ADR20: JP50.2 U6.3
ADR21: JP52.2 U6.2
ADR22: JP53.2 U6.12
ADR23: JP54.2 U6.11
ADR24: JP59.2 U7.3
ADR25: JP61.2 U7.2
ADR26: JP62.2 U7.12
ADR27: JP63.2 U7.11
ADR28: JP68.2 U8.3
ADR29: JP70.2 U8.2
ADR30: JP71.2 U8.12
ADR31: JP72.2 U8.11
ADR32: JP77.2 U9.3
ADR33: JP79.2 U9.2
ADR34: JP80.2 U9.12
ADR35: JP81.2 U9.11
GND: C2.2 D1.C J1.4 J2.1 J3.1 J7.6 JP1.1 JP4.1 JP5.1 JP7.1 S1.2 S1.C U4.14
GND1: C1.2 D2.C J4.1 J6.1 J8.4 J9.6 JP14.1 JP16.1 JP17.1 JP18.1 S2.2 S2.C U1.14
GND2: C3.2 D3.C J11.1 J12.1 J13.4 J14.6 JP23.1 JP25.1 JP26.1 JP27.1 S3.2 S3.C U2.14
GND3: C4.2 D4.C J16.1 J17.1 J18.4 J19.6 JP32.1 JP34.1 JP35.1 JP36.1 S4.2 S4.C U3.14
GND4: C5.2 D5.C J21.1 J22.1 J23.4 J24.6 JP41.1 JP43.1 JP44.1 JP45.1 S5.2 S5.C U5.14
GND5: C6.2 D6.C J26.1 J27.1 J28.4 J29.6 JP50.1 JP52.1 JP53.1 JP54.1 S6.2 S6.C U6.14
GND6: C7.2 D7.C J31.1 J32.1 J33.4 J34.6 JP59.1 JP61.1 JP62.1 JP63.1 S7.2 S7.C U7.14
GND7: C8.2 D8.C J36.1 J37.1 J38.4 J39.6 JP68.1 JP70.1 JP71.1 JP72.1 S8.2 S8.C U8.14
GND8: C9.2 D9.C J41.1 J42.1 J43.4 J44.6 JP77.1 JP79.1 JP80.1 JP81.1 S9.2 S9.C U9.14
INT_R: INT.1 R11.2
INT_R1: INT1.1 R9.2
INT_R2: INT2.1 R15.2
INT_R3: INT3.1 R20.2
INT_R4: INT4.1 R25.2
INT_R5: INT5.1 R30.2
INT_R6: INT6.1 R35.2
INT_R7: INT7.1 R40.2
INT_R8: INT8.1 R45.2
LED: S1.A U4.6
LED1: S2.A U1.6
LED2: S3.A U2.6
LED3: S4.A U3.6
LED4: S5.A U5.6
LED5: S6.A U6.6
LED6: S7.A U7.6
LED7: S8.A U8.6
LED8: S9.A U9.6
MISO: J7.1 U4.8
MISO1: J9.1 U1.8
MISO2: J14.1 U2.8
MISO3: J19.1 U3.8
MISO4: J24.1 U5.8
MISO5: J29.1 U6.8
MISO6: J34.1 U7.8
MISO7: J39.1 U8.8
MISO8: J44.1 U9.8
N$1: D2.A R8.1
N$2: D3.A R14.1
N$3: D1.A R4.1
N$4: D4.A R19.1
N$5: D5.A R24.1
N$6: D6.A R29.1
N$7: D7.A R34.1
N$8: D8.A R39.1
N$9: D9.A R44.1
SCL: J1.1 J2.4 J3.4 J7.3 R2.1 U4.9
SCL1: J4.4 J6.4 J8.1 J9.3 R5.1 U1.9
SCL2: J11.4 J12.4 J13.1 J14.3 R10.1 U2.9
SCL3: J16.4 J17.4 J18.1 J19.3 R16.1 U3.9
SCL4: J21.4 J22.4 J23.1 J24.3 R21.1 U5.9
SCL5: J26.4 J27.4 J28.1 J29.3 R26.1 U6.9
SCL6: J31.4 J32.4 J33.1 J34.3 R31.1 U7.9
SCL7: J36.4 J37.4 J38.1 J39.3 R36.1 U8.9
SCL8: J41.4 J42.4 J43.1 J44.3 R41.1 U9.9
SCL_PU1: JP3.1 R2.2
SCL_PU2: JP15.1 R5.2
SCL_PU3: JP24.1 R10.2
SCL_PU4: JP33.1 R16.2
SCL_PU5: JP42.1 R21.2
SCL_PU6: JP51.1 R26.2
SCL_PU7: JP60.1 R31.2
SCL_PU8: JP69.1 R36.2
SCL_PU9: JP78.1 R41.2
SDA: J1.2 J2.3 J3.3 J7.4 R1.1 U4.7
SDA1: J4.3 J6.3 J8.2 J9.4 R6.1 U1.7
SDA2: J11.3 J12.3 J13.2 J14.4 R12.1 U2.7
SDA3: J16.3 J17.3 J18.2 J19.4 R17.1 U3.7
SDA4: J21.3 J22.3 J23.2 J24.4 R22.1 U5.7
SDA5: J26.3 J27.3 J28.2 J29.4 R27.1 U6.7
SDA6: J31.3 J32.3 J33.2 J34.4 R32.1 U7.7
SDA7: J36.3 J37.3 J38.2 J39.4 R37.1 U8.7
SDA8: J41.3 J42.3 J43.2 J44.4 R42.1 U9.7
SDA_PU1: JP3.3 R1.2
SDA_PU2: JP15.3 R6.2
SDA_PU3: JP24.3 R12.2
SDA_PU4: JP33.3 R17.2
SDA_PU5: JP42.3 R22.2
SDA_PU6: JP51.3 R27.2
SDA_PU7: JP60.3 R32.2
SDA_PU8: JP69.3 R37.2
SDA_PU9: JP78.3 R42.2
STAT: R4.2 U4.10
STAT1: R8.2 U1.10
STAT2: R14.2 U2.10
STAT3: R19.2 U3.10
STAT4: R24.2 U5.10
STAT5: R29.2 U6.10
STAT6: R34.2 U7.10
STAT7: R39.2 U8.10
STAT8: R44.2 U9.10
SWITCH: S1.4 U4.5
SWITCH1: S2.4 U1.5
SWITCH2: S3.4 U2.5
SWITCH3: S4.4 U3.5
SWITCH4: S5.4 U5.5
SWITCH5: S6.4 U6.5
SWITCH6: S7.4 U7.5
SWITCH7: S8.4 U8.5
SWITCH8: S9.4 U9.5